# Altium PCB ARDUINO_MSP430F2370.PcbDoc
Units mil, origin at the board's own origin, x right, y up, seen from the top; angles counter-clockwise.
Board outline 3200 x 2100 mil, 2 copper layers (Top Layer, Bottom Layer); 68 components, 74 nets, 250 pads, 85 vias.
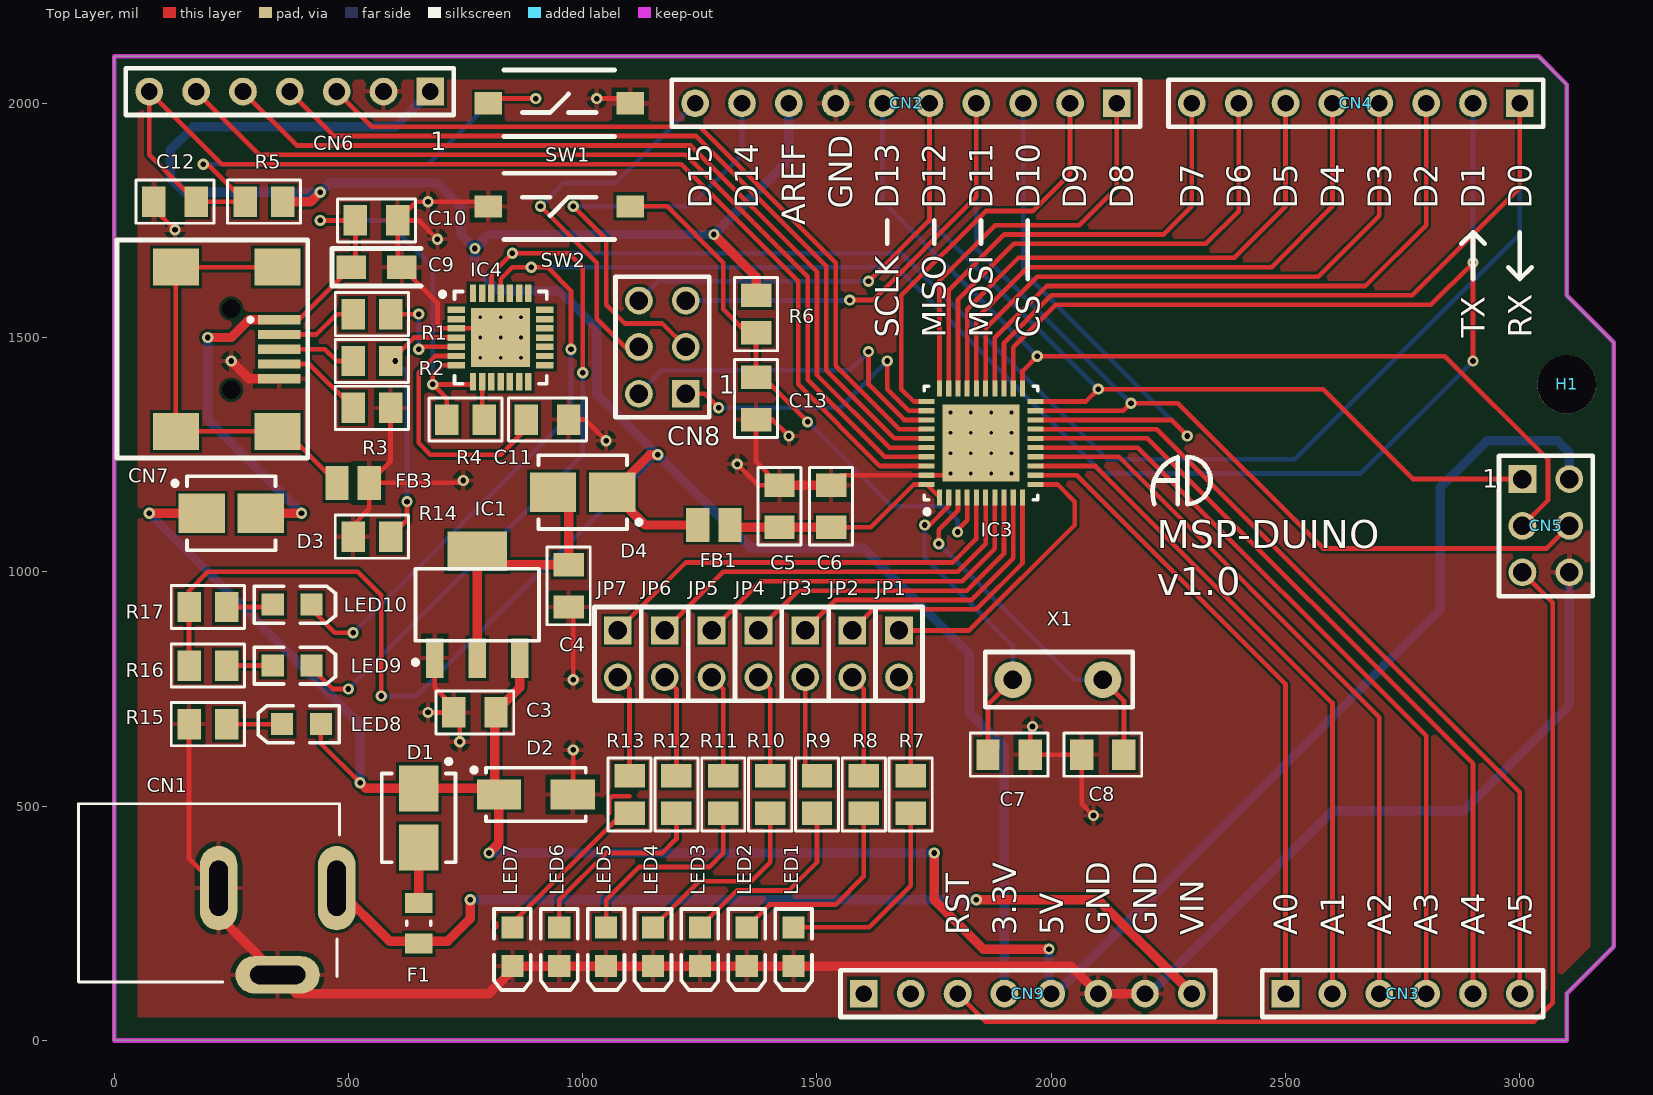
[diagram p0: Top Layer view]
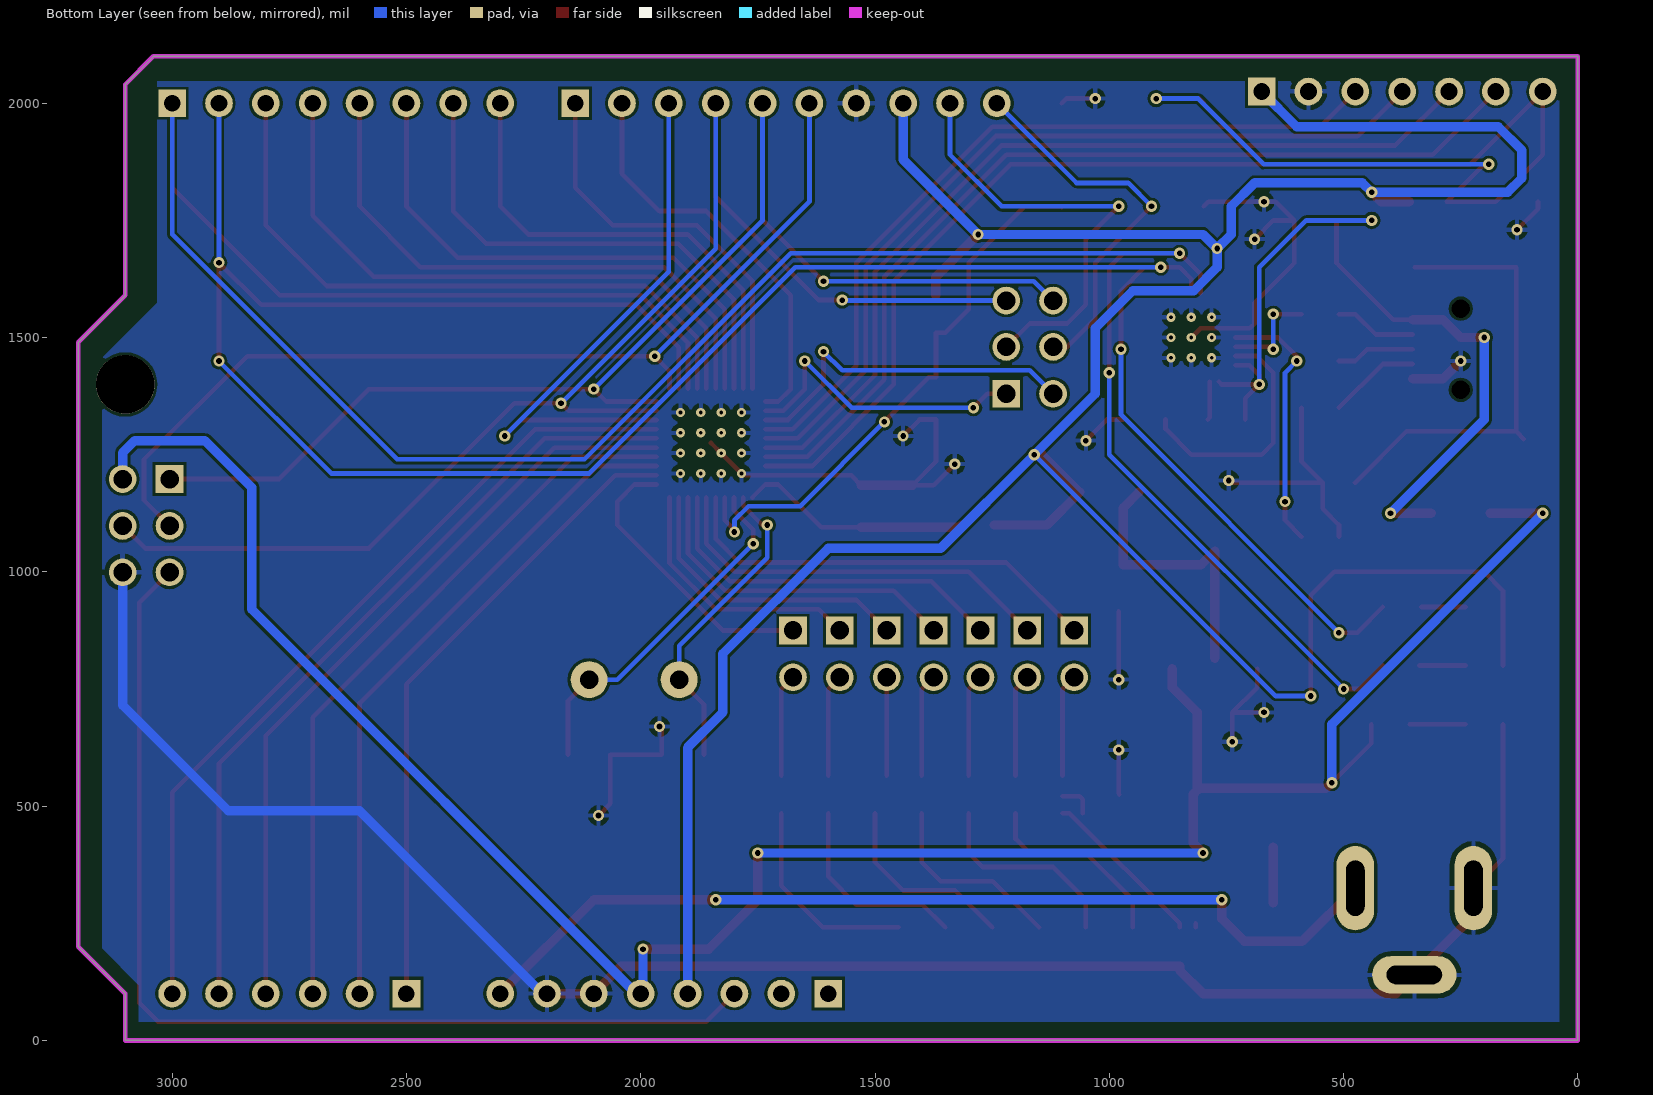
[diagram p1: Bottom Layer view, seen from below]

## Layer stack, top to bottom
Top Solder: solder mask 0.4, Solder Resist, Dk 3.5
Top Layer: signal copper 1.4
Dielectric 1: dielectric 12.6, FR-4, Dk 4.8
Bottom Layer: signal copper 1.4
Bottom Solder: solder mask 0.4, Solder Resist, Dk 3.5

## Board outline
0,0 0,2100 3040,2100 3100,2040 3100,1590 3200,1490 3200,200 3100,100 3100,0

## Design rules (kind name [scope] priority, off if disabled: settings)
Clearance [All] p1: gap=6
PolygonConnect [All] p1: connectstyle=Relief reliefconductorwidth=10 reliefentries=4 polygonreliefangle="90 Angle" airgapwidth=10
RoutingVias [All] p1: holewidth=12 width=24 viastyle="Through Hole" minholewidth=12 minwidth=24 maxholewidth=28 maxwidth=50
SolderMaskExpansion [All] p1: expansion=4
Width [All] p1: maxlimit=20 minlimit=8 preferedwidth=10
30 further rules are at their usual default settings.

## Components (designator, comment, footprint, x,y, rotation, side; value= is the part's Value field where it differs from the comment)
C3 "CAP_NP" CAPC2012X100N_EIA0805 770,700 r0 top
C4 "CAP_NP" CAPC2012X100N_EIA0805 970,970 r90 top
C5 "CAP_NP" CAPC2012X100N_EIA0805 1420,1140 r270 top
C6 "CAP_NP" CAPC2012X100N_EIA0805 1530,1140 r270 top
C7 "CAP_NP" CAPC2012X100N_EIA0805 1910,610 r180 top
C8 "CAP_NP" CAPC2012X100N_EIA0805 2110,610 r0 top
C9 "CAP_P" CAPMP3216X16N_EIA-1206_CASE-A 560,1650 r0 top
C10 "CAP_NP" CAPC2012X100N_EIA0805 560,1750 r180 top
C11 "CAP_NP" CAPC2012X100N_EIA0805 925,1325 r180 top
C12 "CAP_NP" CAPC2012X100N_EIA0805 130,1790 r0 top
C13 "CAP_NP" CAPC2012X100N_EIA0805 1370,1370 r90 top
CN1 "DC_JACK" DC_JACK 475,325 r90 top
CN2 "HDR_1X10" HDRFV10W70P254_1X10_2540X254X1118P 2140,2000 r180 top locked
CN3 "HDR_1X6" HDRFV6W70P254_1X6_1524X254X1118P 2500,100 r0 top locked
CN4 "HDR_1X8" HDRFV8W70P254_1X8_2032X254X1118P 3000,2000 r180 top locked
CN5 "HDR_2X3" HDRV6W64P254_2X3_762X508X600P 3005.51,1198.03 r0 top locked
CN6 "HDR_1X7" HDRFV7W70P254_1X7_1778X254X1118P 675,2025 r180 top
CN7 "USB_MINI_TYPE_B" OST_USB-M26FTR 250,1475 r270 top locked
CN8 "HDR_2X3" HDRV6W64P254_2X3_762X508X600P 1220,1380 r180 top
CN9 "HDR_1X8" HDRFV8W70P254_1X8_2032X254X1118P 1600,100 r0 top (schematic designator CN1)
D1 "DIODE_SCHOTTKY" DIOM4436X24N_DO-214AA_SMB 650,475 r270 top
D2 "DIODE_TVS_UNI" DIOM5126X26N_DO-214AC_SMA 900,525 r0 top
D3 "DIODE_SCHOTTKY" DIOM4436X24N_DO-214AA_SMB 250,1125 r0 top
D4 "DIODE_SCHOTTKY" DIOM4436X24N_DO-214AA_SMB 1000,1170 r180 top (schematic designator D?)
F1 "PTC" FUSEC2012X18N 650,250 r90 top
FB1 "BEAD" FILC2012X100N_EIA0805 1280,1100 r0 top
FB3 "BEAD" FILC2012X100N_EIA0805 510,1190 r0 top
H1 "HOLES" HOLE_125MIL 3320,150 r0 top
IC1 "TLV1117LV33DCYR" SOT230P700X180-4N_[TEXAS]R-PDSO-G4 775,930 r90 top (schematic designator IC?)
IC3 "MSP430F2370" QFN50P600X600X100_HS-41N 1850,1275 r90 top (schematic designator IC?)
IC4 "CP2102" QFN50P500X500X100_HS-29N 825,1500 r0 top
JP1 "JP2" HDRV2W64P254_1X2_508X254X600P 1675,875 r270 top
JP2 "JP2" HDRV2W64P254_1X2_508X254X600P 1575,875 r270 top
JP3 "JP2" HDRV2W64P254_1X2_508X254X600P 1475,875 r270 top
JP4 "JP2" HDRV2W64P254_1X2_508X254X600P 1375,875 r270 top
JP5 "JP2" HDRV2W64P254_1X2_508X254X600P 1275,875 r270 top
JP6 "JP2" HDRV2W64P254_1X2_508X254X600P 1175,875 r270 top
JP7 "JP2" HDRV2W64P254_1X2_508X254X600P 1075,875 r270 top
LED1 "LED" LEDC2012X70N_EIA0805_BLUE 1450,200 r90 top
LED2 "LED" LEDC2012X70N_EIA0805_ORANGE 1350,200 r90 top
LED3 "LED" LEDC2012X70N_EIA0805_RED 1250,200 r90 top
LED4 "LED" LEDC2012X70N_EIA0805_WHITE 1150,200 r90 top
LED5 "LED" LEDC2012X70N_EIA0805_YELLOW 1050,200 r90 top
LED6 "LED" LEDC2012X70N_EIA0805_GREEN 950,200 r90 top
LED7 "LED" LEDC2012X70N_EIA0805_GREEN 850,200 r90 top
LED8 "LED" LEDC2012X70N_EIA0805_GREEN 400,675 r0 top
LED9 "LED" LEDC2012X70N_EIA0805_BLUE 380,800 r180 top
LED10 "LED" LEDC2012X70N_EIA0805_RED 380,930 r180 top
R1 "RES" RESC2013X65N_EIA0805 550,1550 r180 top
R2 "RES" RESC2013X65N_EIA0805 550,1450 r180 top
R3 "RES" RESC2013X65N_EIA0805 550,1350 r0 top
R4 "RES" RESC2013X65N_EIA0805 750,1325 r180 top
R5 "RES" RESC2013X65N_EIA0805 320,1790 r180 top
R6 "RES" RESC2013X65N_EIA0805 1370,1550 r270 top
R7 "RES" RESC2013X65N_EIA0805 1700,525 r90 top
R8 "RES" RESC2013X65N_EIA0805 1600,525 r90 top
R9 "RES" RESC2013X65N_EIA0805 1500,525 r90 top
R10 "RES" RESC2013X65N_EIA0805 1400,525 r90 top
R11 "RES" RESC2013X65N_EIA0805 1300,525 r90 top
R12 "RES" RESC2013X65N_EIA0805 1200,525 r90 top
R13 "RES" RESC2013X65N_EIA0805 1100,525 r90 top
R14 "RES" RESC2013X65N_EIA0805 550,1075 r180 top
R15 "RES" RESC2013X65N_EIA0805 200,675 r180 top
R16 "RES" RESC2013X65N_EIA0805 200,800 r180 top
R17 "RES" RESC2013X65N_EIA0805 200,925 r180 top
SW1 "SWITCH_TACTILE_2PIN" [C&K]RS-282G05A3-SM_RT 950,2000 r0 top
SW2 "SWITCH_TACTILE_2PIN" [C&K]RS-282G05A3-SM_RT 950,1780 r180 top
X1 "CRYSTAL" HC-49/US 1917.87,770 r0 top

## Footprints (in the part's own frame and the unit in brackets; to place one, negate y for a bottom-side part, rotate by r counter-clockwise, add the part's x,y. Pads: shape width x height; smd on the part's side, far side on the other; paste and mask are expansions set on the pad)
[C&K]RS-282G05A3-SM_RT [mm]
  rect 1.5x1.2 smd: 1(-3.85,0) 2(3.85,0)
  silkscreen extent -3,-1.8 3,1.8, body extent -4,-1.75 4,1.75, height 5
CAPC2012X100N_EIA0805 [mil] "Molded Capacitor, 2-Leads, Body 2.05x1.30mm, IPC Medium Density"
  rect 50x65 smd: 1(-45,0) 2(45,0)
  silkscreen extent -83,-46 83,46, body extent -39,-25 39,25, height 31
CAPMP3216X16N_EIA-1206_CASE-A [mm] "Molded Capacitor, 2-Leads, Body 3.20x1.60mm, IPC Medium Density"
  rect 1.6x1.25 smd: 1(-1.375,0) 2(1.375,0)
  silkscreen extent -2.41,-1.02 2.41,1.02, body extent -1.6,-0.8 1.6,0.8, height 1.6
DC_JACK [mil]
  oval 180x80 hole 39.37 slot 118.11 at 0 deg: 1(0,0) 3(0,251.97)
  oval 80x180 hole 39.37 slot 118.11 at 90 deg: 2(-185.04,125.98)
  silkscreen extent -200,-6 180,551, body extent -190,-28 178,574, height 512
DIOM4436X24N_DO-214AA_SMB [mm] "Molded Diode, 2-Leads, Body 4.38x3.62mm, IPC Medium Density"
  rect 2.5x2.15 smd: 1(-1.6,0) 2(1.6,0)
  silkscreen extent -3.17,-2 2.4,2, body extent -2.75,-1.95 2.75,1.95, height 2.45
DIOM5126X26N_DO-214AC_SMA [mm] "Molded Diode, 2-Leads, Body 5.07x2.57mm, IPC Medium Density"
  rect 2.4x1.64 smd: 1(-2,0) 2(2,0)
  silkscreen extent -3.47,-1.45 2.7,1.45, body extent -2.75,-1.4 2.75,1.4, height 2.6
FILC2012X100N_EIA0805 [mm] "Chip Inductor, 2-Leads, Body 2.0x1.3mm, IPC Medium Density"
  rect 1.25x1.85 smd: 1(-0.875,0) 2(0.875,0)
  body extent -1,-0.62 1,0.63, height 0.85
FUSEC2012X18N [mm] "Chip Resistor, 2-Leads, Body 2.15x1.35mm, IPC Medium Density"
  rect 1.1x1.5 smd: 1(-1.1,0) 2(1.1,0)
  silkscreen extent -0.1,-0.65 0.1,0.65, body extent -1.1,-0.75 1.1,0.75, height 1.26
HC-49/US [mm]
  round 2 hole 1: 1(0,0) 2(4.88,0)
  silkscreen extent -1.5,-1.5 6.5,1.5, body extent -2.99,-2.24 7.99,2.25, height 3.6
HDRFV6W70P254_1X6_1524X254X1118P [mm]
  rect 1.5x1.5 hole 0.9: 1(0,0)
  round 1.5 hole 0.9: 2(2.54,0) 3(5.08,0) 4(7.62,0) 5(10.16,0) 6(12.7,0)
  silkscreen extent -1.27,-1.27 13.97,1.27, body extent -1.27,-1.27 13.97,1.27, height 6.02
HDRFV7W70P254_1X7_1778X254X1118P [mm]
  rect 1.5x1.5 hole 0.9: 1(0,0)
  round 1.5 hole 0.9: 2(2.54,0) 3(5.08,0) 4(7.62,0) 5(10.16,0) 6(12.7,0) 7(15.24,0)
  silkscreen extent -1.27,-1.27 16.51,1.27, body extent -1.27,-1.27 16.51,1.27, height 6.02
HDRFV8W70P254_1X8_2032X254X1118P [mm]
  rect 1.5x1.5 hole 0.9: 1(0,0)
  round 1.5 hole 0.9: 2(2.54,0) 3(5.08,0) 4(7.62,0) 5(10.16,0) 6(12.7,0) 7(15.24,0) 8(17.78,0)
  silkscreen extent -1.27,-1.27 19.05,1.27, body extent -1.27,-1.27 19.05,1.27, height 6.02
HDRFV10W70P254_1X10_2540X254X1118P [mm]
  rect 1.5x1.5 hole 0.9: 1(0,0)
  round 1.5 hole 0.9: 2(2.54,0) 3(5.08,0) 4(7.62,0) 5(10.16,0) 6(12.7,0) 7(15.24,0) 8(17.78,0) 9(20.32,0) 10(22.86,0)
  silkscreen extent -1.27,-1.27 24.13,1.27, body extent -1.27,-1.27 24.13,1.27, height 6.02
HDRV2W64P254_1X2_508X254X600P [mm]
  rect 1.5x1.5 hole 1: 1(0,0)
  round 1.5 hole 1: 2(2.54,0)
  silkscreen extent -1.27,-1.27 3.81,1.27, body extent -1.27,-1.27 3.81,1.22, height 8.54
HDRV6W64P254_2X3_762X508X600P [mm]
  rect 1.5x1.5 hole 1: 1(0,0)
  round 1.5 hole 1: 2(2.54,0) 3(0,-2.54) 4(2.54,-2.54) 5(0,-5.055) 6(2.54,-5.055)
  silkscreen extent -1.27,-6.35 3.81,1.27, body extent -1.27,-6.35 3.81,1.22, height 8.54
HOLE_125MIL [mil]
  round 125 hole 125: 1(-220,1250)
LEDC2012X70N_EIA0805_BLUE [mm] "SM LED; 2 Flat Leads"
  rect 1.2x1.2 smd: 1(-1.05,0) 2(1.05,0)
  silkscreen extent -2.35,-1 2.05,1, body extent -1.01,-0.63 1.01,0.62, height 1.1
LEDC2012X70N_EIA0805_GREEN [mm] "SM LED; 2 Flat Leads"
  rect 1.2x1.2 smd: 1(-1.05,0) 2(1.05,0)
  silkscreen extent -2.35,-1 2.05,1, body extent -1.01,-0.62 1.01,0.63, height 1.1
LEDC2012X70N_EIA0805_ORANGE [mm] "SM LED; 2 Flat Leads"
  rect 1.2x1.2 smd: 1(-1.05,0) 2(1.05,0)
  silkscreen extent -2.35,-1 2.05,1, body extent -1.01,-0.62 1.01,0.63, height 1.1
LEDC2012X70N_EIA0805_RED [mm] "SM LED; 2 Flat Leads"
  rect 1.2x1.2 smd: 1(-1.05,0) 2(1.05,0)
  silkscreen extent -2.35,-1 2.05,1, body extent -1.01,-0.62 1.01,0.62, height 1.1
LEDC2012X70N_EIA0805_WHITE [mm] "SM LED; 2 Flat Leads"
  rect 1.2x1.2 smd: 1(-1.05,0) 2(1.05,0)
  silkscreen extent -2.35,-1 2.05,1, body extent -1.03,-0.46 1.03,0.45, height 0.85
LEDC2012X70N_EIA0805_YELLOW [mm] "SM LED; 2 Flat Leads"
  rect 1.2x1.2 smd: 1(-1.05,0) 2(1.05,0)
  silkscreen extent -2.35,-1 2.05,1, body extent -1.01,-0.62 1.01,0.63, height 1.1
OST_USB-M26FTR [mm]
  rect 0.5x2.3 smd: 1(-1.6,2.6) 2(-0.8,2.6) 3(0,2.6) 4(0.8,2.6) 5(1.6,2.6)
  rect 2x2.5 smd: 6(-4.45,2.5) 7(-4.45,-3) 8(4.45,2.5) 9(4.45,-3)
  round 0 hole 1: ""(-2.2,0) ""(2.2,0)
  silkscreen extent -5.92,-6.2 5.89,4.14, body extent -5.35,-5.9 5.35,3.3, height 3.95
QFN50P500X500X100_HS-29N [mm] "PQFN, 28-Leads, Body 5.00x5.00mm, Pitch 0.50mm, Thermal Pad 3.13x3.13mm, IPC Medium Density"
  rect 0.95x0.35 smd: 1(-2.4,1.5) 2(-2.4,1) 3(-2.4,0.5) 4(-2.4,0) 5(-2.4,-0.5) 6(-2.4,-1) 7(-2.4,-1.5) 15(2.4,-1.5) 16(2.4,-1) 17(2.4,-0.5) 18(2.4,0) 19(2.4,0.5) 20(2.4,1) 21(2.4,1.5)
  rect 0.35x0.95 smd: 8(-1.5,-2.4) 9(-1,-2.4) 10(-0.5,-2.4) 11(0,-2.4) 12(0.5,-2.4) 13(1,-2.4) 14(1.5,-2.4) 22(1.5,2.4) 23(1,2.4) 24(0.5,2.4) 25(0,2.4) 26(-0.5,2.4) 27(-1,2.4) 28(-1.5,2.4)
  rect 3.2x3.2 smd: 29(0,0)
  silkscreen extent -3.27,-2.5 2.5,2.5, body extent -2.52,-2.52 2.52,2.52, height 0.91
QFN50P600X600X100_HS-41N [mm] "PQFN, 40-Leads, Body 6.00x6.00mm, Pitch 0.50mm, Thermal Pad 4.15x4.15mm, IPC Medium Density"
  rect 0.85x0.28 smd: 1(-2.95,2.25) 2(-2.95,1.75) 3(-2.95,1.25) 4(-2.95,0.75) 5(-2.95,0.25) 6(-2.95,-0.25) 7(-2.95,-0.75) 8(-2.95,-1.25) 9(-2.95,-1.75) 10(-2.95,-2.25) 21(2.95,-2.25) 22(2.95,-1.75) 23(2.95,-1.25) 24(2.95,-0.75) 25(2.95,-0.25) 26(2.95,0.25) 27(2.95,0.75) 28(2.95,1.25) 29(2.95,1.75) 30(2.95,2.25)
  rect 0.28x0.85 smd: 11(-2.25,-2.95) 12(-1.75,-2.95) 13(-1.25,-2.95) 14(-0.75,-2.95) 15(-0.25,-2.95) 16(0.25,-2.95) 17(0.75,-2.95) 18(1.25,-2.95) 19(1.75,-2.95) 20(2.25,-2.95) 31(2.25,2.95) 32(1.75,2.95) 33(1.25,2.95) 34(0.75,2.95) 35(0.25,2.95) 36(-0.25,2.95) 37(-0.75,2.95) 38(-1.25,2.95) 39(-1.75,2.95) 40(-2.25,2.95)
  rect 4.15x4.15 smd: 41(0,0)
  silkscreen extent -3.85,-3.08 3.08,3.08, body extent -3,-3 3,3, height 0.81
RESC2013X65N_EIA0805 [mil]
  rect 50x65 smd: 1(-40,0) 2(40,0)
  silkscreen extent -78,-46 78,46, body extent -39,-25 39,25, height 31
SOT230P700X180-4N_[TEXAS]R-PDSO-G4 [mm] "SOT223, 4-Leads, Body 6.50x7.00mm (avg), Pitch 2.30mm, IPC Medium Density"
  rect 2.15x0.95 smd: 1(-2.9,2.3) 2(-2.9,0) 3(-2.9,-2.3)
  rect 2.15x3.25 smd: 4(2.9,0)
  silkscreen extent -3.25,-3.35 1.95,3.47, body extent -3.54,-3.25 3.54,3.25, height 1.65

## Part data
C3 C4: library part SCAP00310053, "CAP CER 1UF 25V 10% X7R 0603"
C5 C10 C11: library part SCAP00310048, "CAP CER 0.1UF 50V 10% X7R 0603"
C6: library part SCAP00300098, "CAP CER 2.2UF 16V X5R 0805"
C7 C8: library part SCAP00310014, "CAP CER 18PF 50V 5% NP0 0603"
C9: library part SCAP00367, "CAP TANT 4.7UF 16V 10% 1206"
C12 C13: library part SCAP00310042, "CAP CER 10000PF 50V 10% X7R 0603"
CN1: library part SCON00027, "CONN POWER JACK MALE 2.5MM CLSD"
CN2: library part SCON00126, "CONN ARDUINO HEADER .0100\" 10POS"
CN3: library part SCON00124, "CONN ARDUINO HEADER .0100\" 6POS"
CN4 CN9: library part SCON00125, "CONN ARDUINO HEADER .0100\" 8POS"
CN5 CN8: library part SCON00128, "CONN HEADER FMALE 6PS .1\" DL TIN"
CN6: library part SCON00129, "CONN ARDUINO HEADER .0100\" 7POS"
CN7: library part SCON00017, "CONN USB MINI B R/A SMD"
D1 D3 D4: library part SSEM00019, "DIODE SCHOTTKY 5A 40V SMA"
D2: library part SCP00004, "TVS DIODE 5VWM 13.4VC DO214AC"
F1: library part SCP00003, "PTC RESTTBLE 1.0A 6V CHIP 0805"
FB1 FB3: library part SFIL00005, "FERRITE CHIP POWER 120 OHM SMD"
H1: library part SMSC00005, "Holes"
IC1: library part SIC00137, "IC REG LDO 3.3V 1A SOT223"
IC3: library part SIC00129, "IC MCU 16BIT 32KB FLASH 40VQFN"
IC4: library part SIC00136, "IC USB-TO-UART BRIDGE 28VQFN"
JP1 JP2 JP3 JP4 JP5 JP6 JP7: library part SCON00130, "SIL VERTICAL PC TAIL PIN HEADER"
LED1 LED9: library part SOPT00001, "LED BLUE CLEAR 0805 SMD"
LED2: library part SOPT00003, "LED ORANGE CLEAR 0805 SMD"
LED3 LED10: library part SOPT00004, "LED SUPER RED CLR THIN 0805 SMD"
LED4: library part SOPT00005, "LED WHITE YELLOW 280MCD 0805"
LED5: library part SOPT00006, "LED YELLOW CLEAR RT ANG 0805"
LED6 LED7 LED8: library part SOPT00002, "LED GREEN CLEAR THIN 0805 SMD"
R1 R2: library part SRES03010034, "RES SMD 22 OHM 1% 1/8W 0805"
R3: library part SRES03010122, "RES SMD 100K OHM 1% 1/8W 0805"
R4: library part SRES03010090, "RES SMD 4.7K OHM 1% 1/8W 0805"
R5 R6: library part SRES03010098, "RES SMD 10K OHM 1% 1/8W 0805"
R7 R8 R9 R10 R11 R12 R13 R16 R17: library part SRES03010062, "RES SMD 330 OHM 1% 1/8W 0805"
R14: library part SRES03010078, "RES SMD 1.5K OHM 1% 1/8W 0805"
R15: library part SRES03010074, "RES SMD 1K OHM 1% 1/8W 0805"
SW1 SW2: library part SSWI00022, "SWITCH TACTILE SPST-NO 0.05A 12V"
X1: library part SCRY00011, "CRYSTAL 16.0000MHZ 20PF T/H"

## Via types
v1: diameter 24, hole 12, Top Layer to Bottom Layer, 60 vias
v2: diameter 19.68, hole 7.87, Top Layer to Bottom Layer, 25 vias

## Nets (pads, with @x,y where several pads share a name; then routed paths per layer and width w, separated by ;. In a path a pad name is that pad's centre, name@x,y a point inside that pad or via, vN(x,y) a via of type N, cw(c..) or ccw(c..) an arc to the next point about the centre after c; other vN are vias at no path point)
3V3: CN2.8 CN6.1 CN9.4 D4.1 FB1.1 R5.1 R6.1 R16.2 R17.2 | length 6797
  Top Layer w10: R16.2 R17.2 160,960 200,1000 520,1000 570,950 v1(570,735)
  Top Layer w20: R5.1 420,1790 v1(440,1810) ; v1(1160,1250) 1142.99,1250 D4.1 1132.99,1100 FB1.1 ; v1(1280,1720) 1370,1630 R6.1
  Bottom Layer w10: v1(570,735) 645,735 v1(1160,1250)
  Bottom Layer w20: CN6.1 600,1950 170,1950 120,1900 120,1840 150,1810 v1(440,1810) 460,1830 690,1830 740,1780 740,1720 v1(770,1690) ; CN2.8 1440,1880 v1(1280,1720) 800,1720 v1(770,1690) ; CN9.4 1900,625 1825,700 1825,825 1600,1050 1360,1050 v1(1160,1250) 1030,1380 1030,1520 950,1600 820,1600 770,1650 v1(770,1690)
5V: C3.2 CN5.2 CN9.5 D1.1 D2.1 D3.1 IC1.3 LED8.2 | length 5003.9
  Top Layer w10: LED8.2 441.34,633.66 v1(525,550)
  Top Layer w20: v1(75,1125) D3.1 ; v1(525,550) 537.01,537.99 D1.1 808.27,537.99 D2.1@812.4,533.86 ; v1(800,400) 821.26,421.26 D2.1 D2.1@812.4,533.86 ; IC1.3@865.55,793.11 865.55,753.15 812.4,700 D2.1@812.4,533.86 ; v1(1750,400) 1750,300 1855,195 v1(1995,195)
  Bottom Layer w20: v1(75,1125) 525,675 v1(525,550) ; v1(800,400) v1(1750,400) ; v1(1995,195) 1995,105 CN9.5 2010,100 2830,920 2830,1180 2930,1280 3080,1280 3105.51,1254.49 CN5.2
5V_USB: C9.1 C10.2 CN7.1 D3.2 IC4.7 IC4.8 R4.2 | length 1877.9
  Top Layer w10: CN7.1 393.86,1537.99 C9.1 515,1659.13 C10.2 v1(440,1750) ; R4.2 710,1370 v1(680,1400) ; IC4.7 700.94,1440.94 680,1420 v1(680,1400) ; IC4.8 760.43,1400 v1(680,1400)
  Top Layer w20: v1(200,1500) 250,1500 287.99,1537.99 CN7.1 ; D3.2 v1(400,1125)
  Bottom Layer w10: v1(440,1750) 580,1750 680,1650 v1(680,1400)
  Bottom Layer w20: v1(200,1500) 200,1325 v1(400,1125)
A0: CN3.1 IC3.12 | length 1382
  Top Layer w10: IC3.12 2053.9,1206.1 2500,760 CN3.1
  Bottom Layer w8: CN3.1@2496.63,100 CN3.1
A1: CN3.2 IC3.13 | length 1466.7
  Top Layer w10: IC3.13 2094.21,1225.79 2600,720 CN3.2
  Bottom Layer w8: CN3.2 CN3.2@2603.37,100
A2: CN3.3 IC3.14 | length 1553.9
  Top Layer w10: IC3.14 2144.53,1245.47 2700,690 CN3.3
A3: CN3.4 IC3.15 | length 1638.7
  Top Layer w10: IC3.15 2184.84,1265.16 2800,650 CN3.4
A4: CN3.5 IC3.16 | length 1711.7
  Top Layer w10: IC3.16 2205.16,1284.84 2900,590 CN3.5
A5: CN3.6 IC3.17 | length 1784.7
  Top Layer w10: IC3.17 2225.47,1304.53 3000,530 CN3.6
D0: CN4.1 IC3.23 IC4.26 LED9.1 | length 5804.9
  Top Layer w10: LED9.1@416.34,800 466.34,750 v1(500,750) ; IC4.26 805.31,1635.31 v1(850,1680) 970,1680 1000,1650 v1(1000,1425) ; IC3.23 1899.21,1489.21 2000,1590 2770,1590 3000,1820 CN4.1
  Bottom Layer w10: v1(500,750) 1000,1250 v1(1000,1425) ; v1(850,1680) 1680,1680 2120,1240 2520,1240 3000,1720 CN4.1
D1: CN4.2 IC3.22 IC4.25 LED10.1 | length 5226.2
  Top Layer w10: LED10.1@416.34,925 471.34,870 v1(510,870) ; IC4.25 825,1625 850,1650 v1(890,1650) 925,1650 975,1600 v1(975,1475) ; IC3.22 1918.9,1478.9 2010,1570 2810,1570 v1(2900,1660) ; v1(2900,1450) v1@2900,1650
  Bottom Layer w10: v1(510,870) 975,1335 v1(975,1475) ; v1(890,1650) 1670,1650 2110,1210 2660,1210 v1(2900,1450) ; v1(2900,1660) CN4.2
D2: CN4.3 IC3.24 | length 1408.5
  Top Layer w10: IC3.24 1879.53,1499.53 1990,1610 2670,1610 2800,1740 CN4.3
  Bottom Layer w10: CN4.3@2800,1980 CN4.3
D3: CN4.4 IC3.25 | length 1308.3
  Top Layer w10: IC3.25 1859.84,1519.84 1970,1630 2570,1630 2700,1760 CN4.4
D4: CN4.5 IC3.26 | length 1228.2
  Top Layer w10: IC3.26 1840.16,1540.16 1950,1650 2470,1650 2600,1780 CN4.5
D5: CN4.6 IC3.27 | length 1159.8
  Top Layer w10: IC3.27 1820.47,1560.47 1930,1670 2390,1670 2500,1780 CN4.6
D6: CN4.7 IC3.28 | length 1097.2
  Top Layer w10: IC3.28 1800.79,1580.79 1920,1700 2330,1700 2400,1770 CN4.7
D7: CN4.8 IC3.29 | length 1023
  Top Layer w10: IC3.29 1781.1,1601.1 1900,1720 2240,1720 2300,1780 CN4.8
D8: CN2.1 IC3.30 | length 871.1
  Top Layer w10: IC3.30 1761.42,1621.42 1880,1740 2060,1740 2140,1820 CN2.1
D9: CN2.2 IC3.31 | length 882.5
  Top Layer w10: IC3.31 1706.42,1363.58 1680,1390 1680,1590 1860,1770 1960,1770 2040,1850 CN2.2
D10: CN2.3 IC3.18 | length 1193
  Top Layer w10: IC3.18 2255.79,1324.21 v1(2290,1290)
  Bottom Layer w10: CN2.3 1940,1640 v1(2290,1290)
D11: CN2.4 CN5.4 CN8.5 IC3.19 | length 2982.6
  Top Layer w10: v1(1570,1580) 1620,1580 1840,1800 CN2.4 ; IC3.19 2153.9,1343.9 v1(2170,1360) 2270,1360 2580,1050 3057.48,1050 CN5.4
  Bottom Layer w10: CN8.5 1569.01,1579.01 v1(1570,1580) ; CN2.4 1840,1690 v1(2170,1360)
D12: CN2.5 CN5.1 CN8.6 IC3.20 | length 2829.8
  Top Layer w10: v1(1610,1620) 1740,1750 CN2.5 ; IC3.20 2073.58,1363.58 v1(2100,1390) 2580,1390 2771.97,1198.03 CN5.1
  Bottom Layer w10: CN8.6 1160.98,1620 v1(1610,1620) ; CN2.5 1740,1750 v1(2100,1390)
D13: CN2.6 CN5.3 IC3.21 | length 2104.2
  Top Layer w10: IC3.21 1938.58,1428.58 v1(1970,1460) 2840,1460 3060,1240 3060,1152.52 CN5.3
  Bottom Layer w10: CN2.6 1640,1790 v1(1970,1460)
D14: CN2.9 CN8.3 | length 961.8
  Top Layer w10: v1(980,1780) 1050,1710 1050,1570 1090,1530 1170,1530 CN8.3
  Bottom Layer w10: v1(980,1780) 1230,1780 1340,1890 CN2.9
D15: CN2.10 CN8.4 | length 825.7
  Top Layer w10: v1(910,1780) 1030,1660 1030,1540 1090,1480 CN8.4
  Bottom Layer w10: v1(910,1780) 960,1830 1070,1830 CN2.10
GND: C3.1 C4.1 C5.1 C6.1 C7.1 C8.1 C9.2 C10.1 C11.1 C12.1 C13.1 CN1.2 CN1.3 CN2.7 CN5.6 CN6.2 CN7.5 CN9.6 CN9.7 D2.2 FB3.2 IC1.1 IC3.39 IC3.41 IC4.3 IC4.29 LED1.1 LED2.1 LED3.1 LED4.1 LED5.1 LED6.1 LED7.1 R3.2 R14.2 R15.2 SW1.2 SW2.2 | length 8698.8
  Top Layer w10: C12.1 85,1775 v1(130,1730) ; R15.2 160,388.03 CN1.3 ; R14.2 510,1100 544.45,1134.45 FB3.2 ; R3.2 590,1235.55 FB3.2 ; v1(670,700) C3.1@737.6,700 ; IC1.1@684.45,793.11 684.45,753.15 C3.1@737.6,700 ; v1(690,1710) 650,1750 C10.1 ; v1(737.6,637.6) C3.1@737.6,700 ; v1(745,1195) 740,1190 FB3.2 ; SW2.2 788.43,1790 v1(670,1790) 645,1790 C10.1 ; v2(825,1500) 805.31,1519.69 IC4.3 700.31,1519.69 690,1530 690,1574.13 C9.2 605,1659.13 C10.1 ; C11.1 1005,1325 v1(1050,1280) ; D2.2 980,526.26 v1(980,620) ; v1(980,770) C4.1@980,915.87 ; v1(1030,2010) 1091.57,2010 SW1.2 ; v1(1330,1230) 1375,1185 C5.1 1370,1235 C13.1 1405,1325 v1(1440,1290) ; C6.1 1551.1,1206.1 IC3.39 1781.1,1206.1 v2(1785.04,1210.04) v2(1828.35,1253.35) IC3.41 ; v1(1960,670) 1955,665 C7.1 C8.1 2065,505 v1(2090,480)
  Top Layer w20: CN1.3 223.03,265.94 CN1.2 388.98,100 800,100 850,150 LED7.1 ; v1(250,1450) 287.99,1412.01 CN7.5 ; LED6.1 LED7.1 ; LED5.1 LED7.1 ; LED4.1 LED7.1 ; LED3.1 LED7.1 ; LED2.1 LED7.1 ; C5.1 C6.1 ; CN9.7 CN9.6 2041.34,158.66 1450,158.66 LED7.1
  Bottom Layer w20: CN9.7 2210,100 2600,490 2880,490 3105.52,715.52 CN5.6
  other v2: 1828.35,1210.04 1871.65,1210.04 1914.96,1210.04 1785.04,1253.35 1871.65,1253.35 1914.96,1253.35 1785.04,1296.65 1828.35,1296.65 1871.65,1296.65 1914.96,1296.65 1785.04,1339.96 1828.35,1339.96 1871.65,1339.96 1914.96,1339.96 781.69,1456.69 825,1456.69 868.31,1456.69 781.69,1500 868.31,1500 781.69,1543.31 825,1543.31 868.31,1543.31
IOREF: CN9.2
JTAG_RST: C12.2 CN6.7 IC3.38 R5.2 SW1.1 | length 3497
  Top Layer w10: v1(190,1870) 200,1870 R5.2 C12.2 75,1890 CN6.7 230,1870 1210,1870 1460,1620 1460,1400 1634.21,1225.79 IC3.38 ; SW1.1 808.43,2010 v1(900,2010)
  Bottom Layer w10: v1(190,1870) 670,1870 810,2010 v1(900,2010)
JTAG_TCK: CN6.6 IC3.37 | length 2010.6
  Top Layer w10: CN6.6 310,1890 1220,1890 1480,1630 1480,1410 1644.53,1245.47 IC3.37
JTAG_TDI: CN6.4 IC3.35 | length 1795.9
  Top Layer w10: CN6.4 470,1930 1242.63,1930 1520,1652.63 1520,1430 1665.16,1284.84 IC3.35
JTAG_TDO: CN6.3 IC3.34 | length 1686.2
  Top Layer w10: CN6.3 550,1950 1250,1950 1540,1660 1540,1440 1675.47,1304.53 IC3.34
JTAG_TMS: CN6.5 IC3.36 | length 1902.5
  Top Layer w10: CN6.5 390,1910 1230,1910 1500,1640 1500,1420 1654.84,1265.16 IC3.36
LED1: JP1.2 R7.2 | length 220.4
  Top Layer w10: JP1.2 1700,750 R7.2
LED2: JP2.2 R8.2 | length 220.4
  Top Layer w10: JP2.2 1600,750 R8.2
LED3: JP3.2 R9.2 | length 210
  Top Layer w10: R9.2@1475,565 JP3.2
LED4: JP4.2 R10.2 | length 220.4
  Top Layer w10: JP4.2 1400,750 R10.2
LED5: JP5.2 R11.2 | length 220.4
  Top Layer w10: JP5.2 1300,750 R11.2
LED6: JP6.2 R12.2 | length 220.4
  Top Layer w10: JP6.2 1200,750 R12.2
LED7: JP7.2 R13.2 | length 220.4
  Top Layer w10: JP7.2 1100,750 R13.2
N\R\S\T\: CN5.5 CN9.3 | length 2257.2
  Top Layer w10: CN9.3 1860,40 3030,40 3070,80 3070,934.54 CN5.5
NetC4_2: C4.2 D4.2 IC1.2 IC1.4 | length 604.1
  Top Layer w20: IC1.2 IC1.4 804.17,1015 C4.2 970,1137.01 D4.2
NetC5_2: C5.2 C6.2 FB1.2 IC3.1 IC3.40 | length 498.3
  Top Layer w10: C6.2 1615,1095 1706.42,1186.42 IC3.40 IC3.1
  Top Layer w20: FB1.2 1319.45,1095 C5.2 C6.2
NetC7_2: C7.2 IC3.2 X1.1 | length 675.8
  Top Layer w10: v1(1730,1100) 1740.36,1100 1781.1,1140.74 IC3.2 ; C7.2 1865,717.13 X1.1
  Bottom Layer w10: v1(1730,1100) 1730,1030 1917.87,842.13 X1.1
NetC8_2: C8.2 IC3.3 X1.2 | length 764.5
  Top Layer w10: v1(1760,1060) 1760,1090 1800.79,1130.79 IC3.3 ; X1.2 2155,725 C8.2
  Bottom Layer w10: v1(1760,1060) 2050,770 X1.2
NetC11_2: C11.2 IC4.6 | length 528.4
  Top Layer w10: IC4.6 685.63,1460.63 650,1425 650,1275 675,1250 825,1250 880,1305 C11.2
NetCN7_2: CN7.2 R1.2 | length 175.7
  Top Layer w10: CN7.2 431.5,1506.5 475,1550 R1.2
NetCN7_3: CN7.3 R2.2 | length 168
  Top Layer w10: CN7.3 450,1475 475,1450 R2.2
NetCN7_4: CN7.4 R3.1 | length 196.4
  Top Layer w10: CN7.4 416.5,1443.5 R3.1
NetCN7_6: CN7.6 CN7.7 CN7.8 CN7.9 FB3.1 | length 979.2
  Top Layer w10: CN7.9@115.55,1283.46 CN7.9 ; CN7.6 CN7.7 CN7.9 ; FB3.1 365.75,1299.8 CN7.8 CN7.9
NetD1_2: D1.2 F1.2 | length 118.7
  Top Layer w20: F1.2 D1.2
NetIC4_9: IC4.9 R4.1 | length 82.3
  Top Layer w10: IC4.9 785.63,1329.37 R4.1
NetLED1_2: LED1.2 R7.1 | length 441.7
  Top Layer w10: LED1.2 1611.32,241.32 1700,330 R7.1
NetLED2_2: LED2.2 R8.1 | length 430
  Top Layer w10: LED2.2 1398.66,290 1540,290 1600,350 R8.1
NetLED3_2: LED3.2 R9.1 | length 412.4
  Top Layer w10: LED3.2 1328.68,320 1440,320 1500,380 R9.1
NetLED4_2: LED4.2 R10.1 | length 412.4
  Top Layer w10: LED4.2 1248.66,340 1360,340 1400,380 R10.1
NetLED5_2: LED5.2 R11.1 | length 435.1
  Top Layer w10: LED5.2 1050,300 1120,370 1270,370 1300,400 R11.1
NetLED6_2: LED6.2 R12.1 | length 417.5
  Top Layer w10: LED6.2 950,300 1050,400 1170,400 1200,430 R12.1
NetLED7_2: LED7.2 R13.1 | length 356
  Top Layer w10: LED7.2 850,250 1085,485 R13.1
NetLED8_1: LED8.1 R15.1 | length 118.7
  Top Layer w10: R15.1 LED8.1
NetLED9_2: LED9.2 R16.1 | length 98.7
  Top Layer w10: R16.1 LED9.2
NetLED10_2: LED10.2 R17.1 | length 93.7
  Top Layer w10: R17.1 LED10.2@333.66,925
P1.1: IC3.5 JP7.1 | length 934.7
  Top Layer w10: JP7.1 1220,1020 1790,1020 1840.16,1070.16 IC3.5
P1.2: IC3.6 JP6.1 | length 860.6
  Top Layer w10: JP6.1 1300,1000 1800,1000 1860,1060 1860,1158.7 IC3.6
P1.3: IC3.7 JP5.1 | length 786.1
  Top Layer w10: JP5.1 1380,980 1810,980 1879.53,1049.53 IC3.7
P1.4: IC3.8 JP4.1 | length 711.9
  Top Layer w10: JP4.1 1460,960 1820,960 1899.21,1039.21 IC3.8
P1.5: IC3.9 JP3.1 | length 637.6
  Top Layer w10: JP3.1 1540,940 1830,940 1918.9,1028.9 IC3.9
P1.6: IC3.10 JP2.1 | length 563.3
  Top Layer w10: JP2.1 1620,920 1840,920 1938.58,1018.58 IC3.10
P1.7: IC3.11 JP1.1 | length 617.1
  Top Layer w10: JP1.1 1825,875 2050,1100 2050,1150 2013.58,1186.42 IC3.11
P4.6: CN8.1 IC3.32 | length 646.8
  Top Layer w10: CN8.1 1260,1380 v1(1290,1350) ; v1(1650,1450) 1650,1390 1696.1,1343.9 IC3.32
  Bottom Layer w10: v1(1290,1350) 1550,1350 v1(1650,1450)
P4.7: CN8.2 IC3.33 | length 752.5
  Top Layer w10: v1(1610,1470) 1610,1400 1685.79,1324.21 IC3.33
  Bottom Layer w10: CN8.2 1170,1430 1570,1430 v1(1610,1470)
USB_DM: IC4.5 R1.1 | length 217.7
  Top Layer w10: R1.1 v1(650,1550) ; v1(650,1475) 655.32,1480.32 IC4.5
  Bottom Layer w10: v1(650,1475) v1(650,1550)
USB_DP: IC4.4 R2.1 R14.1 | length 554
  Top Layer w10: R14.1 625,1110 v1(625,1150) ; R2.1@595,1455 640,1500 IC4.4
  Bottom Layer w10: v1(600,1450) 625,1425 v1(625,1150)
USER_BUTTON: C13.2 IC3.4 R6.2 SW2.1 | length 1199.1
  Top Layer w10: SW2.1@1101.57,1778.43 SW2.1 1180,1780 1300,1660 1300,1560 1350,1510 R6.2 C13.2 1385,1415 v1(1480,1320) ; v1(1800,1085) 1800,1090 1820.47,1110.47 IC3.4
  Bottom Layer w10: v1(1480,1320) 1660,1140 1770,1140 1800,1110 v1(1800,1085)
VIN: CN1.1 CN9.8 F1.1 | length 2014.5
  Top Layer w20: CN1.1 587.99,212.01 650,212.01 712.01,212.01 760,260 v1(760,300) ; v1(1840,300) 2100,300 CN9.8
  Bottom Layer w20: v1(760,300) v1(1840,300)
pads on no net: CN7. CN9.1 H1.1 IC4.1 IC4.2 IC4.10 IC4.11 IC4.12 IC4.13 IC4.14 IC4.15 IC4.16 IC4.17 IC4.18 IC4.19 IC4.20 IC4.21 IC4.22 IC4.23 IC4.24 IC4.27 IC4.28
copper on no net: | length 84.4
  Top Layer w10: 815.38,241.34 815.38,250 ; 1056.5,485 1056.5,514.56 1062.94,521 1100,521

## Polygon pours and split planes (outlines as drawn)
GND on Bottom Layer "Bottom Layer-No Net" (solid, remove dead copper, pour order 2): 39.37,39.37 3070.87,39.37 3070.87,118.11 3149.61,196.85 3149.61,1456.69 3031.5,1574.8 3031.5,2047.24 39.37,2047.24 39.37,39.37
GND on Top Layer "Bottom Layer-No Net" (solid, remove dead copper, pour order 4): 50,50 3050,50 3050,100 3150,200 3150,1450 3050,1550 3050,2000 3000,2050 50,2050 50,50

## Keep-outs
Keep-Out Layer:
  the board outline again, w10

## Silkscreen, mask and mechanical layers (free items; w line width, h text height)
Top Overlay:
  lines w10: 1650,1700 1650,1750 ; 1750,1700 1750,1750 ; 1850,1700 1850,1750 ; 1950,1625 1950,1750 ; 2220,1145 cw(c2295,1170) 2270,1245 2270,1145 ; 2220,1195 2270,1195 ; 2875,1700 2900,1725 ; 2900,1625 2900,1725 ; 2925,1700 2900,1725 ; 2975,1650 3000,1625 ; 3000,1725 3000,1625 ; 3025,1650 3000,1625 ; 2290,1145 ccw(c2290,1195) 2290,1245 2290,1145
  text "D15" at 1275,1775 h50 r90
  text "D14" at 1375,1775 h50 r90
  text "GND" at 1575,1775 h50 r90
  text "D13" at 1675,1775 h50 r90
  text "D12" at 1775,1775 h50 r90
  text "D11" at 1875,1775 h50 r90
  text "D10" at 1975,1775 h50 r90
  text "D9" at 2075,1775 h50 r90
  text "D8" at 2175,1775 h50 r90
  text "D7" at 2325,1775 h50 r90
  text "D6" at 2425,1775 h50 r90
  text "D5" at 2525,1775 h50 r90
  text "D4" at 2625,1775 h50 r90
  text "D3" at 2725,1775 h50 r90
  text "D2" at 2825,1775 h50 r90
  text "D1" at 2925,1775 h50 r90
  text "D0" at 3025,1775 h50 r90
  text "AREF" at 1475,1740 h50 r90
  text "SCLK" at 1675,1500 h50 r90
  text "MISO" at 1775,1500 h50 r90
  text "MOSI" at 1875,1500 h50 r90
  text "CS" at 1975,1500 h50 r90
  text "TX" at 2925,1500 h50 r90
  text "RX" at 3025,1500 h50 r90
  text "MSP-DUINO" at 2225,1050 h60
  text "v1.0" at 2225,950 h60
  text "RST" at 1825,225 h50 r90
  text "3.3V" at 1925,225 h50 r90
  text "5V" at 2025,225 h50 r90
  text "GND" at 2125,225 h50 r90
  text "GND" at 2225,225 h50 r90
  text "VIN" at 2325,225 h50 r90
  text "A0" at 2525,225 h50 r90
  text "A1" at 2625,225 h50 r90
  text "A2" at 2725,225 h50 r90
  text "A3" at 2825,225 h50 r90
  text "A4" at 2925,225 h50 r90
  text "A5" at 3025,225 h50 r90

## Text inside footprints (layer, text, board x,y; h text height)
CN5: Top Overlay "1" at 2920,1180 h39.37
CN6: Top Overlay "1" at 675,1900 h39.37
CN8: Top Overlay "1" at 1290,1380 h39.37